# EAGLE board NeoGram_v0.1 (EAGLE 9.5.2)
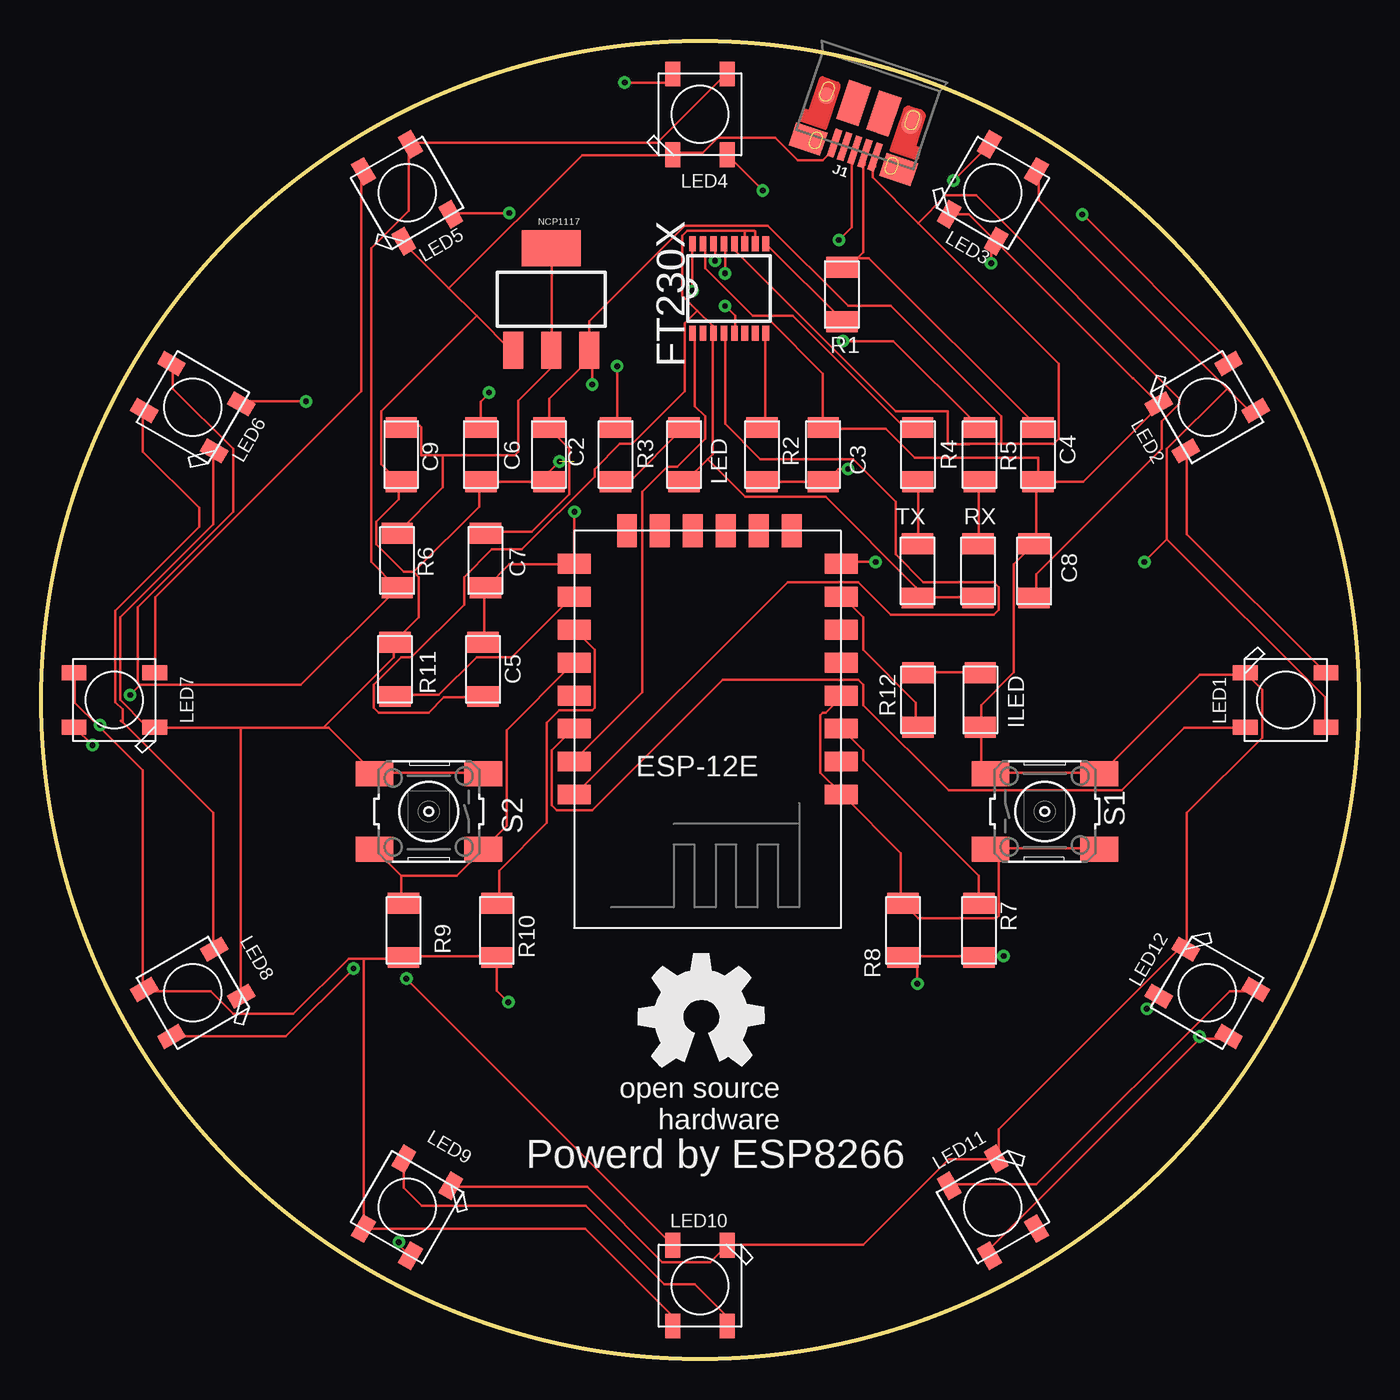
[diagram p0: board, top side]
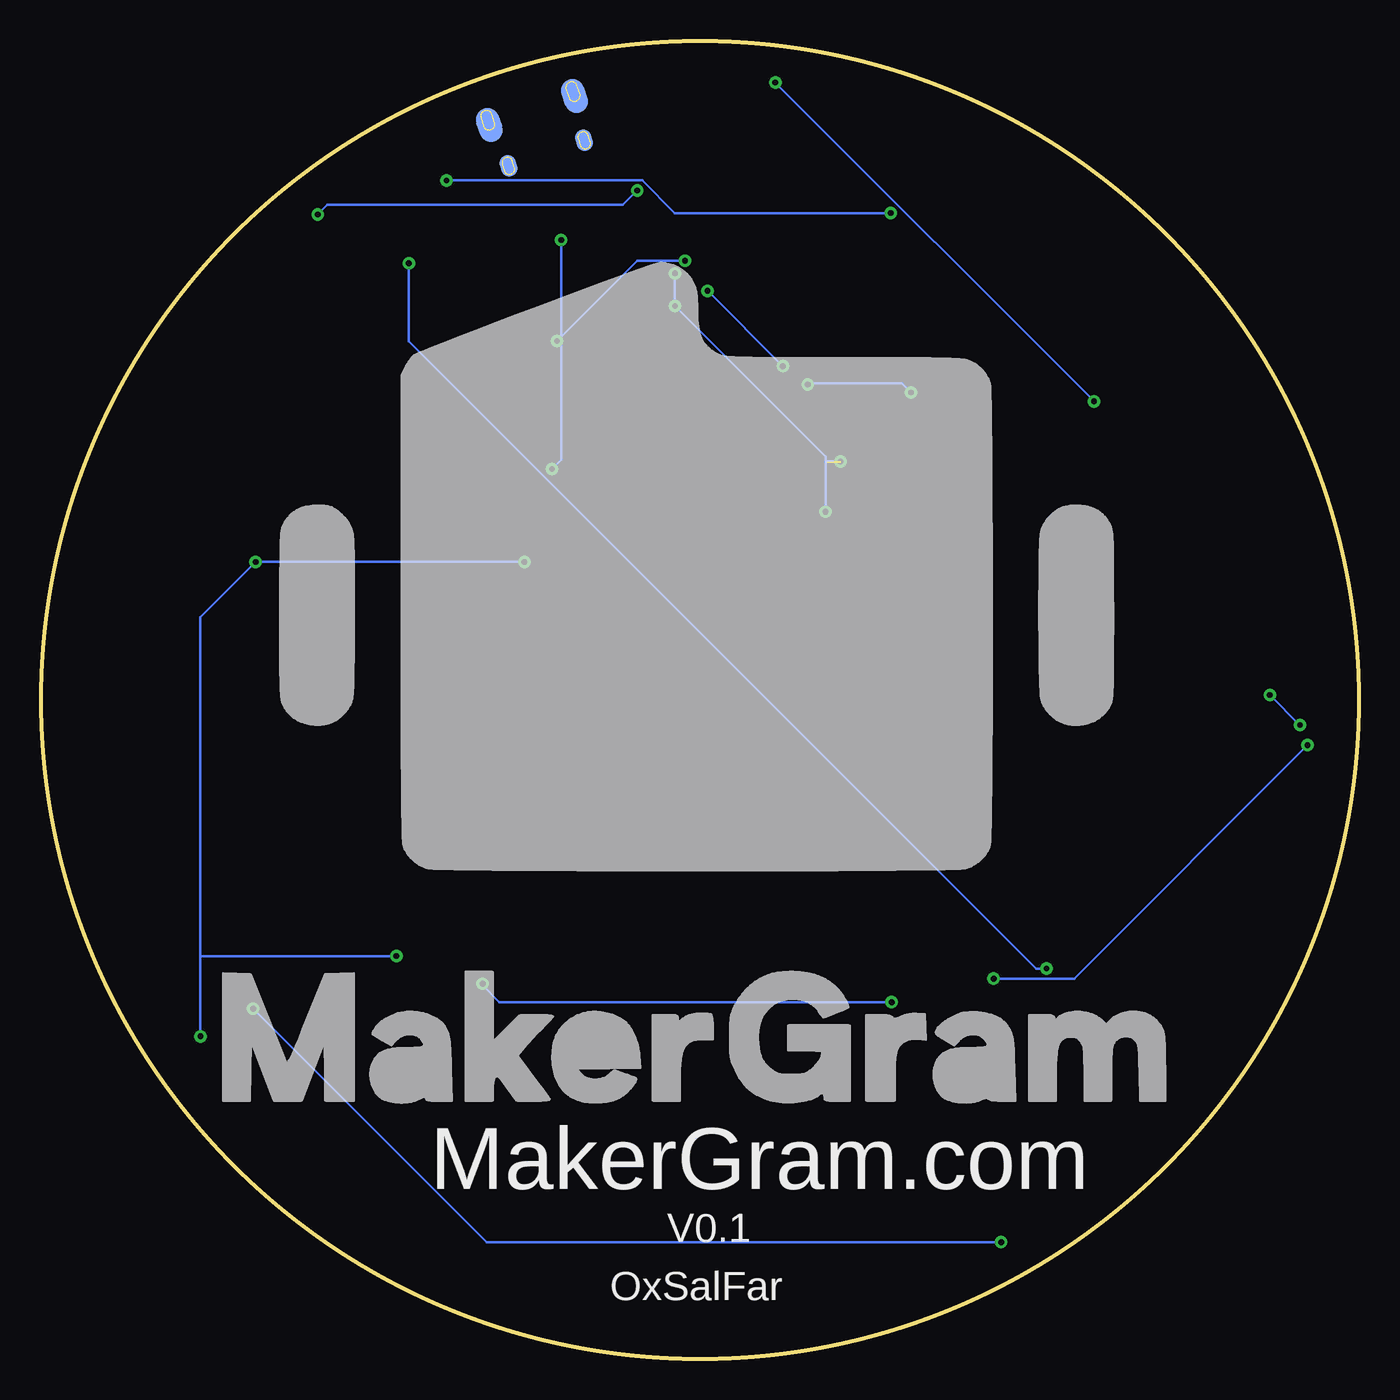
[diagram p1: board, bottom side, seen from below]

Size 80 x 80 mm. Coordinates in mm from the lower left corner, seen from the top.
Outline: circle at 40,40 radius 40
Copper layers (1*16): Top 0.035mm / dielectric 1.5mm / Bottom 0.035mm
Design rules "default": minimum track width 6mil, minimum drill 0.35mm, track to track 6mil, track to pad 6mil, pad to pad 6mil, via to via 6mil, smd to smd 6mil, copper to edge 40mil, drill to drill 6mil, minimum pad ring 10mil, minimum via ring 8mil, stop-mask expansion 4mil, vias tented up to drill 0mil, thermal gap 10mil

## Footprints (pad centres in the part's own frame; a part is rotated, then mirrored left to right if it is on the bottom)
C1206FAB = smd 1.27 x 1.905: 1 -1.651,0; 2 1.651,0
SSOP16 = smd 0.914 x 0.406: 1 -2.718,2.223; 2 -2.718,1.587; 3 -2.718,0.953; 4 -2.718,0.318; 5 -2.718,-0.318; 6 -2.718,-0.953; 7 -2.718,-1.587; 8 -2.718,-2.223; 9 2.718,-2.223; 10 2.718,-1.587; 11 2.718,-0.953; 12 2.718,-0.318; 13 2.718,0.318; 14 2.718,0.953; 15 2.718,1.587; 16 2.718,2.223
LED1206 = smd 1.27 x 1.905: 1 -1.651,0; 2 1.651,0
USB-MICROB-PTH-MILL = smd 0.4 x 1.75: D+ 0,0; D- -0.65,0; GND 1.3,0; ID 0.65,0; VBUS -1.3,0 | smd 2 x 1.46: SHIELD -2.9,0.275; SHIELD2 2.9,0.275 | smd 1.425 x 2.5: SHIELD3 -0.963,-2.675; SHIELD4 0.963,-2.675 | smd 1.4 x 2.1 bottom: SHIELD5 -2.731,-2.531; SHIELD7 2.729,-2.531 | smd 1 x 1: SHIELD6 2.7,-2.575 | smd 1.1 x 1.5: SHIELD8 -2.731,-2.731 | smd 1 x 1.3 bottom: SHIELD9 -2.43,0.195; SHIELD10 2.43,0.195
WS2812B = smd 1.5 x 0.9: 1-VDD 2.45,-1.65; 2-DOUT 2.45,1.65; 3-GND -2.45,1.65; 4-DIN -2.45,-1.65
SOT223 = smd 1.219 x 2.235: 1 -2.311,-3.099; 2 0,-3.099; 3 2.311,-3.099 | smd 3.6 x 2.2: 4 0,3.099
R1206 = smd 1.27 x 1.905: 1 -1.651,0; 2 1.651,0
6MM_SWITCH = smd 2.286 x 1.524: 1 -3.302,2.286; 2 3.302,2.286; 3 -3.302,-2.286; 4 3.302,-2.286
ESP-12E-SOC = smd 2 x 1.2: 1 -7.62,5.84; 2 -7.62,3.84; 3 -7.62,1.84; 4 -7.62,-0.16; 5 -7.62,-2.16; 6 -7.62,-4.16; 7 -7.62,-6.16; 8 -7.62,-8.16; 9 8.58,-8.16; 10 8.58,-6.16; 11 8.58,-4.16; 12 8.58,-2.16; 13 8.58,-0.16; 14 8.58,1.84; 15 8.58,3.84; 16 8.58,5.84 | smd 1.2 x 2: 17 -4.62,-10.16; 18 -2.62,-10.16; 19 -0.62,-10.16; 20 1.38,-10.16; 21 3.38,-10.16; 22 5.38,-10.16

## Placement (x,y rotation side)
C2  10nF  [C1206FAB]  30.83,54.9 270 top
C3  47pF  [C1206FAB]  47.48,54.9 270 top
C4  47pF  [C1206FAB]  60.53,54.9 90 top
C5  100nF  [C1206FAB]  26.83,41.86 90 top
C6  4.7uF  [C1206FAB]  26.7,54.9 90 top
C7  100nF  [C1206FAB]  26.97,48.48 90 top
C8  4.7uF  [C1206FAB]  60.28,47.84 270 top
C9  4.7uF  [C1206FAB]  21.86,54.9 270 top
FT230X  FT230XS  [SSOP16]  41.77,64.97 90 top
GOLD_ORB_SM1  OSHWLOGOLOGO8MM  [OSHW_8MM]  40.05,20.75 0 top
ILED  LED  [LED1206]  57.02,40 270 top
J1  [USB-MICROB-PTH-MILL]  49.4,73.39 161.4 top
LED  LED  [LED1206]  39.03,54.9 90 top
LED1  WS2812B5050  [WS2812B]  75.56,40 0 top
LED2  WS2812B5050  [WS2812B]  70.8,57.78 30 top
LED3  WS2812B5050  [WS2812B]  57.78,70.8 60 top
LED4  WS2812B5050  [WS2812B]  40,75.56 90 top
LED5  WS2812B5050  [WS2812B]  22.22,70.8 120 top
LED6  WS2812B5050  [WS2812B]  9.2,57.78 150 top
LED7  WS2812B5050  [WS2812B]  4.44,40 180 top
LED8  WS2812B5050  [WS2812B]  9.2,22.22 210 top
LED9  WS2812B5050  [WS2812B]  22.22,9.2 240 top
LED10  WS2812B5050  [WS2812B]  40,4.44 270 top
LED11  WS2812B5050  [WS2812B]  57.78,9.2 300 top
LED12  WS2812B5050  [WS2812B]  70.8,22.22 330 top
NCP1117  NCP1117_SOT223  [SOT223]  30.97,64.33 0 top
R1  27R  [R1206]  48.62,64.62 90 top
R2  27R  [R1206]  43.78,54.9 90 top
R3  1k  [R1206]  34.88,54.9 270 top
R4  1k  [R1206]  53.22,54.9 270 top
R5  1k  [R1206]  56.97,54.9 270 top
R6  0  [R1206]  21.62,48.48 270 top
R7  10k  [R1206]  56.95,26.01 270 top
R8  10k  [R1206]  52.33,26.01 270 top
R9  10k  [R1206]  22,26.01 270 top
R10  10k  [R1206]  27.66,26.01 270 top
R11  10k  [R1206]  21.48,41.86 270 top
R12  1k  [R1206]  53.24,40 90 top
RX  RXLED  [LED1206]  56.88,47.84 90 top
S1  Reset  [6MM_SWITCH]  60.93,33.23 0 top
S2  Flash  [6MM_SWITCH]  23.54,33.23 180 top
SJR1  [ESP-12E-SOC]  40.94,40.1 180 top
TX  TXLED  [LED1206]  53.21,47.84 90 top
U$1  [MGLOGO]  1.6,-3.24 0 top  (outside the outline)

## Library data of the parts
C2-C9 = fab
FT230X ILED LED NCP1117 R1-R12 RX S1 S2 SJR1 TX U$1 = MG-ESP8266-Badge
GOLD_ORB_SM1 = oshw
J1 = SparkFun-Connectors; PROD_ID: CONN-13711
LED1-LED12 = adafruit

## Nets
3.3V: LED1.1-VDD LED2.1-VDD LED3.1-VDD LED4.1-VDD LED5.1-VDD LED6.1-VDD LED7.1-VDD LED8.1-VDD LED9.1-VDD LED10.1-VDD LED11.1-VDD LED12.1-VDD R6.2 R7.2 R8.2 R9.2 R10.2 SJR1.8
4: SJR1.13
5: LED1.4-DIN SJR1.14
12: SJR1.6
A0: SJR1.2
D+: C3.2 J1.D+ R2.1
D-: C4.2 J1.D- R1.2
GND: C2.2 C3.1 C4.1 C5.2 C6.1 C7.1 C8.1 C9.2 FT230X.5 FT230X.13 ILED.2 J1.GND LED1.3-GND LED2.3-GND LED3.3-GND LED4.3-GND LED5.3-GND LED6.3-GND LED7.3-GND LED8.3-GND LED9.3-GND LED10.3-GND LED11.3-GND LED12.3-GND NCP1117.1 R11.1 S1.1 S1.2 S2.3 S2.4 SJR1.9
N$1: FT230X.9 R1.1
N$2: FT230X.8 R2.2
N$3: R8.1 S1.3 S1.4 SJR1.1 SJR1.4
N$4: C5.1 FT230X.3 FT230X.10 FT230X.11 LED.1 RX.1 TX.1
N$5: R7.1 SJR1.3
N$6: FT230X.16 R3.1
N$7: FT230X.15 R4.1
N$8: FT230X.14 R5.1
N$9: R5.2 RX.2
N$10: R4.2 TX.2
N$11: C9.1 NCP1117.2 NCP1117.4 R6.1
N$12: R9.1 S2.1 S2.2 SJR1.12
N$14: LED.2 R3.2
N$15: R11.2 SJR1.10
N$17: LED1.2-DOUT LED2.4-DIN
N$18: R12.1 SJR1.7
N$19: ILED.1 R12.2
N$20: LED2.2-DOUT LED4.4-DIN
N$21: LED4.2-DOUT LED6.4-DIN
N$22: LED6.2-DOUT LED8.4-DIN
N$23: LED3.4-DIN LED8.2-DOUT
N$26: LED5.2-DOUT LED7.4-DIN
N$27: LED7.2-DOUT LED10.4-DIN
N$28: LED9.4-DIN LED10.2-DOUT
N$29: LED9.2-DOUT LED12.4-DIN
N$30: LED11.4-DIN LED12.2-DOUT
N$31: LED3.2-DOUT LED5.4-DIN
RX: FT230X.4 SJR1.16
SCL: SJR1.5
SDA: R10.1 SJR1.11
TX: FT230X.1 SJR1.15
VCC: C2.1 C6.2 C7.2 C8.2 FT230X.12 J1.VBUS NCP1117.3

## Tracks (layer width: path | path; a pad name or v marks a point on that pad's centre or on a via)
3.3V  (via drill 0.35)
  Top 0.152: 70.33,19.43 57.68,6.78 57.68,6.32 LED11.1-VDD | 70.33,19.43 72,19.43 LED12.1-VDD | 72,58.9 60.57,70.33 60.57,72 LED3.1-VDD | 72,58.9 73.22,57.68 73.68,57.68 LED2.1-VDD | 68.35,49.75 77.95,40.15 77.95,38.48 LED1.1-VDD | 68.35,49.75 68.35,55.24 72,58.9 | v50.67,48.38 48.69,48.38 SJR1.8 | 68.35,49.75 v66.97,48.38 | v70.33,19.58 70.33,19.43 | LED4.1-VDD 41.52,77.95 37.41,73.83 22.47,73.83 LED5.1-VDD 22.32,73.68 22.32,69.72 20.04,67.43 20.04,48.38 21.56,46.86 R6.2 21.56,46.71 15.77,40.91 6.02,40.91 | 6.02,40.91 5.86,41.07 5.86,45.64 11.65,51.43 11.65,55.24 8,58.9 8,60.42 LED6.1-VDD | 52.86,24.45 56.92,24.45 R7.2 57.07,24.45 v58.44,24.45 | 52.86,24.45 52.34,24.45 R8.2 | 19.58,24.3 21.86,24.3 R9.2 22.02,24.45 27.66,24.45 R10.2 27.66,22.36 v28.36,21.66 | 19.58,24.3 18.66,24.3 15.31,20.95 11.65,20.95 10.28,22.32 6.32,22.32 LED8.1-VDD 6.17,22.47 6.17,35.73 3.42,38.48 | 3.42,38.48 2.05,39.85 2.05,41.52 LED7.1-VDD | 19.58,24.3 19.58,8 LED9.1-VDD | 38.32,2.05 LED10.1-VDD | LED9.1-VDD 19.58,7.84 | v5.41,40.3 6.02,40.91 | 3.42,38.48 v3.58,38.48 | 38.62,2.56 38.62,2.26 38.52,2.16 | 38.52,2.16 LED10.1-VDD | LED9.1-VDD 33.02,7.91 38.35,2.58 LED10.1-VDD | LED10.1-VDD 38.35,2.16 | 38.35,2.16 38.52,2.16 | LED10.1-VDD 38.35,2.16 | LED10.1-VDD 38.35,2.16 | v53.2,22.77 53.2,24.12 52.86,24.45
  Bottom 0.152: v50.67,48.38 v66.97,48.38 70.33,45.03 70.33,24.45 | 70.33,24.45 v70.33,19.58 | v3.58,38.48 v5.41,40.3 | v58.44,24.45 70.33,24.45 | v28.36,21.66 52.18,21.66 53.2,22.67 v53.2,22.77
5
  Top 0.152: LED1.4-DIN 73.07,38.32 69.41,38.32 65.6,34.51 55.09,34.51 49.91,39.7 49.91,40.91 49.6,41.22 41.37,41.22 33.45,33.29 31.31,33.29 31.01,33.6 31.01,36.95 32.23,38.17 SJR1.14
D+  (via drill 0.35)
  Top 0.152: v48.99,54.02 48.38,54.02 47.62,53.26 C3.2 47.47,53.26 43.81,53.26 R2.1 | J1.D+ 49.4,73.29 | 49.4,73.29 49.24,73.14 49.22,73.12 49.22,68.71 v48.43,67.92 | J1.D+ 49.4,73.29 | J1.D+ 49.4,73.29
  Bottom 0.152: v48.43,67.92 48.43,54.58 v48.99,54.02
D-
  Top 0.152: 49.04,66.41 48.99,66.36 48.69,66.36 R1.2 48.76,66.41 49.04,66.41 | 49.04,66.41 49.43,66.8 49.44,66.82 49.54,66.82 | 60.42,56.61 C4.2 50.26,66.82 49.54,66.82 | 49.63,72.45 50.01,72.83 J1.D- 50.01,72.49 49.91,72.39 49.91,67.19 49.54,66.82
GND  (via drill 0.35)  (1 unrouted)
  Top 0.152: J1.GND 48.08,73.68 48.08,73.38 47.47,72.77 45.94,72.77 44.57,74.14 41.07,74.14 40.15,73.22 38.48,73.22 LED4.3-GND 38.32,73.07 32.84,73.07 24.76,64.99 | 26.44,63.32 28.57,61.18 NCP1117.1 | 26.44,63.32 24.76,64.99 | 24.76,64.99 22.02,67.74 LED5.3-GND | 17.14,38.32 17.45,38.32 20.19,35.58 S2.4 20.34,35.58 26.74,35.58 S2.3 | 17.14,38.32 12.11,38.32 | 12.11,38.32 6.93,38.32 LED7.3-GND 6.78,38.48 6.32,38.48 4.8,40 4.8,45.03 10.43,50.67 10.43,55.09 LED6.3-GND | 12.11,38.32 12.11,22.02 LED8.3-GND | 17.14,38.32 21.41,42.59 21.41,43.51 R11.1 21.56,43.66 22.93,45.03 22.93,47.47 22.63,47.77 | 22.63,47.77 22.02,47.77 20.34,49.45 20.34,50.82 21.71,52.19 21.71,53.11 C9.2 21.71,53.26 20.64,54.33 20.64,57.53 26.44,63.32 | 22.63,47.77 26.59,51.73 26.59,53.11 C6.1 26.74,53.26 30.7,53.26 C2.2 30.86,53.26 30.86,53.87 v31.47,54.48 | LED9.3-GND 24.91,10.43 33.14,10.43 37.71,5.86 40.61,5.86 41.52,6.78 LED10.3-GND 41.68,6.93 49.91,6.93 55.09,12.11 57.98,12.11 LED11.3-GND 58.14,12.26 58.14,13.94 68.96,24.76 69.41,24.76 LED12.3-GND 69.57,24.91 69.57,33.14 74.14,37.71 74.14,40.61 73.22,41.52 LED1.3-GND 73.07,41.52 70.33,41.52 64.38,35.58 S1.2 64.23,35.58 57.68,35.58 S1.1 57.53,35.58 57.07,36.04 57.07,38.32 ILED.2 57.07,38.48 57.07,39.7 59.05,41.68 59.05,48.23 60.27,49.45 C8.1 60.42,49.6 60.42,53.11 C4.1 | C5.2 26.89,43.66 26.89,46.71 C7.1 27.05,46.86 28.42,48.23 32.23,48.23 SJR1.9 32.38,48.38 v32.38,51.43 | FT230X.5 42.13,62.4 42.13,63.04 | v41.52,65.91 41.52,67.58 FT230X.13 | C4.1 63.27,53.24 68.06,58.04 67.8,58.04 67.74,57.98 LED2.3-GND 66.29,59.54 66.27,59.54 56.31,69.5 LED3.3-GND
  Top 0.152: C4.1 60.53,54.7 53.03,54.7 51.28,56.46 47.62,56.46 C3.1 47.47,56.61 47.47,59.81 44.27,63.01 42.16,63.01 42.13,63.04 | v41.52,63.93 42.13,63.32 42.13,63.04
  Bottom 0.152: v41.52,65.91 v41.52,63.93 32.38,54.78 32.38,54.51 31.49,54.51 v31.47,54.48 | 32.38,54.48 v32.38,51.43
N$1
  Top 0.152: FT230X.9 44.12,67.58 48.69,63.01 R1.1
N$2
  Top 0.152: FT230X.8 43.96,62.25 43.96,56.76 43.81,56.61 R2.2
N$3
  Top 0.152: 58.14,31.01 64.23,31.01 S1.4 | 58.14,31.01 57.68,31.01 S1.3 58.14,31.01 | SJR1.4 48.53,40.15 47.62,39.24 47.47,39.24 47.31,39.09 47.31,35.58 48.53,34.36 SJR1.1 48.69,34.21 52.19,30.7 52.19,27.81 R8.1 52.34,27.66 53.26,26.74 57.98,26.74 58.14,26.89 58.14,31.01
N$4
  Top 0.152: RX.1 56.76,46.25 53.26,46.25 TX.1 53.11,46.25 53.11,46.86 47.62,52.34 42.74,52.34 40.46,54.63 | 43.35,67.74 FT230X.10 43.36,68.45 | 40.46,54.63 39.09,53.26 LED.1 | 40.46,54.63 40.76,54.94 40.76,62.25 FT230X.3 40.76,62.4 40.76,62.71 39.85,63.62 | 42.71,68.5 39.24,68.5 38.93,68.19 38.93,64.54 39.85,63.62 | 42.71,68.5 43.31,68.5 43.36,68.45 | 42.59,67.74 FT230X.11 42.74,67.74 42.71,67.77 42.71,68.5 | 39.85,63.62 39.09,62.86 39.09,58.75 35.88,55.55 35.12,55.55 33.6,54.02 33.6,53.56 29.18,49.14 27.35,49.14 25.67,47.47 25.67,45.79 22.47,42.59 21.86,42.59 20.19,40.91 20.19,39.54 20.49,39.24 23.54,39.24 24.45,40.15 26.74,40.15 C5.1 | 43.36,68.45
N$5
  Top 0.152: R7.1 56.92,27.81 56.92,29.33 49.91,36.34 49.91,36.95 48.69,38.17 SJR1.3
N$6  (via drill 0.35)
  Top 0.152: v39.54,64.84 39.54,67.58 FT230X.16 | v34.97,60.27 34.97,56.61 R3.1
  Bottom 0.152: v34.97,60.27 v39.54,64.84
N$7
  Top 0.152: FT230X.15 40.3,67.58 40.3,66.21 43.2,63.32 45.64,63.32 52.34,56.61 53.11,56.61 R4.1
N$8  (via drill 0.35)
  Top 0.152: v40.91,66.67 40.91,67.58 FT230X.14 | v48.69,61.79 51.73,61.79 56.92,56.61 R5.1
  Bottom 0.152: v40.91,66.67 43.81,66.67 v48.69,61.79
N$9
  Top 0.152: RX.2 56.92,49.6 56.92,53.11 R5.2
N$10
  Top 0.152: TX.2 53.26,49.6 53.26,53.11 R4.2
N$11
  Top 0.152: 21.71,50.21 R6.1 24.39,52.91 24.39,54.86 | 21.86,56.46 21.86,56.53 | 21.86,56.53 C9.1 | 31.01,61.49 31.01,67.28 NCP1117.4 | 31.01,61.49 31.01,61.34 NCP1117.2 30.86,61.18 | 31.01,61.49 31.15,61.35 31.15,60.36 28.96,58.17 28.96,55.07 28.75,54.86 24.39,54.86 | 24.39,54.86 23.08,54.86 23.08,56.56 23,56.65 21.98,56.65 21.86,56.53
N$12
  Top 0.152: 21.86,29.33 21.86,27.81 R9.1 | 21.86,29.33 20.34,30.86 S2.2 | SJR1.12 32.23,42.13 28.27,38.17 28.27,32.38 26.89,31.01 S2.1 26.74,30.86 25.22,29.33 21.86,29.33
N$14
  Top 0.152: R3.2 34.97,53.26 35.73,53.26 38.93,56.46 LED.2
N$15
  Top 0.152: R11.2 21.56,40.3 24.15,40.3 26.44,42.59 28.57,42.59 32.23,46.25 SJR1.10
N$17
  Top 0.152: LED2.4-DIN 69.57,55.09 69.57,50.06 77.95,41.68 LED1.2-DOUT
N$18
  Top 0.152: R12.1 53.11,38.48 53.11,39.85 49.91,43.05 49.91,45.03 48.69,46.25 SJR1.7
N$19
  Top 0.152: R12.2 53.26,41.68 56.92,41.68 ILED.1
N$20  (via drill 0.35)
  Top 0.152: v63.21,69.48 63.23,69.48 71.77,60.94 LED2.2-DOUT | v43.81,70.94 41.68,73.07 LED4.4-DIN
  Bottom 0.152: v43.81,70.94 44.69,70.06 62.43,70.06 62.63,70.06 v63.21,69.48
N$21  (via drill 0.35)
  Top 0.152: v16.07,58.14 12.26,58.14 LED6.4-DIN | v35.43,77.49 37.87,77.49 38.32,77.95 LED4.2-DOUT
  Bottom 0.152: v35.43,77.49 v16.07,58.14
N$22
  Top 0.152: 4.84,38.74 4.94,38.64 | 4.94,38.64 10.43,33.14 10.43,24.91 LED8.4-DIN | LED6.2-DOUT 6.17,57.53 6.17,55.08 9.58,51.66 9.58,50.51 4.49,45.42 4.49,39.87 4.94,39.43 4.94,38.64
N$23  (via drill 0.35)
  Top 0.152: v18.97,23.69 14.85,19.58 8,19.58 LED8.2-DOUT | v57.68,66.52 57.68,67.43 57.98,67.74 LED3.4-DIN
  Bottom 0.152: v18.97,23.69 19.58,23.69 57.68,61.79 v57.68,66.52
N$26
  Top 0.152: LED7.4-DIN 6.93,41.68 6.93,46.25 19.43,58.75 19.43,72 LED5.2-DOUT
N$27  (via drill 0.35)
  Top 0.152: v22.17,23.08 38.32,6.93 LED10.4-DIN | v3.12,37.26 2.05,38.32 LED7.2-DOUT
  Bottom 0.152: v22.17,23.08 17.29,23.08 v3.12,37.26
N$28
  Top 0.152: 22.02,11.81 22.02,12.11 LED9.4-DIN 22.02,10.4 23.11,9.3 33.06,9.3 37.83,4.52 39.68,4.52 41.65,2.55 LED10.2-DOUT 41.52,2.05
N$29  (via drill 0.35)
  Top 0.152: v21.71,7.08 21.71,6.93 22.32,6.32 LED9.2-DOUT | v67.13,21.25 67.74,21.86 LED12.4-DIN
  Bottom 0.152: v21.71,7.08 52.95,7.08 v67.13,21.25
N$30
  Top 0.152: LED11.4-DIN 55.24,10.59 60.42,10.59 72.16,22.32 73.68,22.32 LED12.2-DOUT
N$31  (via drill 0.35)
  Top 0.152: v28.42,69.57 24.91,69.57 LED5.4-DIN | v55.39,71.55 57.53,73.68 LED3.2-DOUT
  Bottom 0.152: v28.42,69.57 41.52,69.57 43.51,71.55 v55.39,71.55
RX
  Top 0.152: FT230X.4 41.52,62.25 41.52,56.76 43.66,54.63 49.3,54.63 51.89,52.04 51.89,48.84 53.56,47.16 57.83,47.16 58.14,46.86 58.14,45.49 57.83,45.18 51.58,45.18 49.6,47.16 45.33,47.16 32.38,34.21 SJR1.16
SDA
  Top 0.152: R10.1 27.81,27.81 27.81,29.64 30.7,32.53 30.7,38.63 31.47,39.39 33.45,39.39 33.6,39.54 33.6,43.05 32.38,44.27 SJR1.11
TX
  Top 0.152: FT230X.1 39.7,62.25 39.7,57.83 40.3,57.22 40.3,55.85 38.63,54.17 38.02,54.17 36.49,52.65 36.49,40.46 32.38,36.34 SJR1.15
VCC  (via drill 0.35)
  Top 0.152: C7.2 27.05,50.21 29.79,50.21 32.08,52.5 32.08,55.24 30.86,56.46 C2.1 30.86,56.61 30.86,58.29 33.14,60.57 33.14,60.97 | 26.74,56.61 C6.2 26.7,58.12 27.19,58.61 v27.19,58.67 | 33.14,61.34 NCP1117.3 | 33.14,60.97 33.14,61.18 NCP1117.3 | 58.29,55.55 61.49,55.55 61.79,55.85 61.79,60.42 53.26,68.96 | 56,55.55 56.35,55.55 | 56.35,55.55 58.29,55.55 | 53.26,68.96 50.48,71.74 50.48,72.42 | FT230X.12 42.13,67.58 42.13,67.28 51.89,57.53 55.04,57.53 55.04,55.54 56.35,55.54 56.35,55.55 | 53.26,68.96 | 53.26,68.96 54.94,70.63 56.76,70.63 69.11,58.29 69.11,57.98 68.04,56.92 68.04,55.24 60.42,47.62 60.42,46.25 C8.2 | 58.29,55.55 58.29,57.22 51.58,63.93 48.99,63.93 44.12,68.8 39.09,68.8 33.28,63 NCP1117.3 | v33.46,59.15 33.46,60.65 33.14,60.97 | J1.VBUS 50.63,72.42 50.48,72.42 | 50.48,72.42 50.39,72.42 50.3,72.42
  Bottom 0.152: v27.19,58.67 27.76,59.24 33.46,59.24 v33.46,59.15

## Text on the board
tPlace: Powerd by ESP8266
bPlace: MakerGram.com | V0.1 | OxSalFar